# Allegro board FPMemory.brd
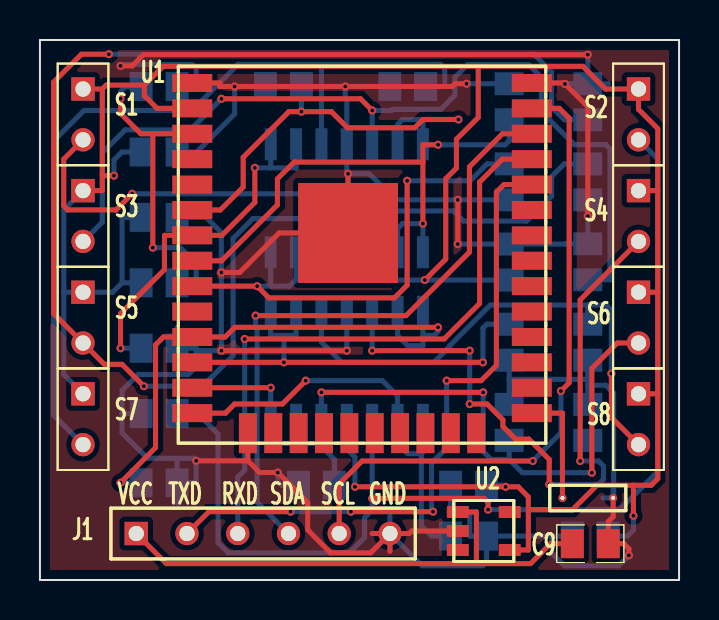
[diagram p0: board, top side]
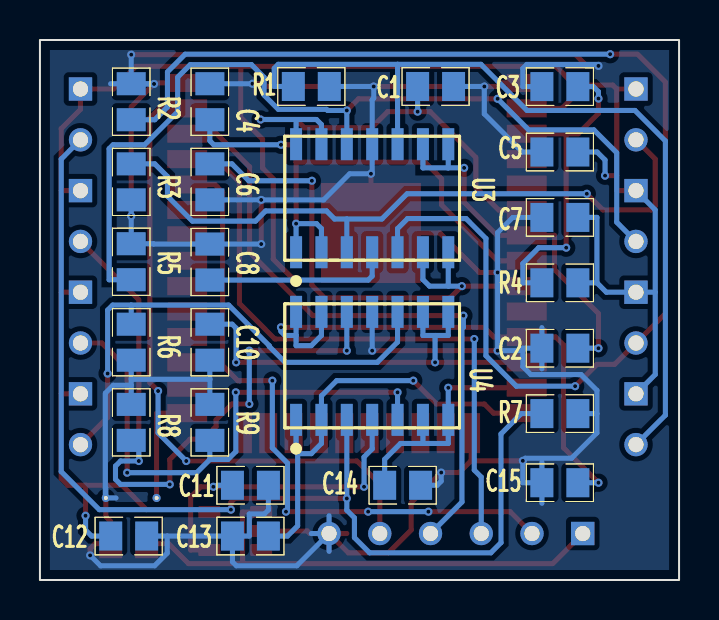
[diagram p1: board, bottom side, seen from below]

Outline 32 x 27 mm; copper layers: TOP, BOTTOM. Coordinates in mm from the lower left corner of the outline.
Outline path: rectangle 0,0 32,27

## Design rules (mm)
constraint set DEFAULT: min track width 0.254, pair gap 0.254

## Placement (name value [footprint] x y rotation side)
C1  0.1uF  [CAP0805]  12.19 24.68 0 bottom
C2  0.1uF  [CAP0805]  5.97 11.59 0 bottom
C3  0.1uF  [CAP0805]  5.97 24.67 180 bottom
C4  0.1uF  [CAP0805]  23.49 23.91 270 bottom
C5  10uF  [CAP0805]  5.97 21.4 180 bottom
C6  0.1uF  [CAP0805]  23.49 19.91 270 bottom
C7  0.1uF  [CAP0805]  5.97 18.13 180 bottom
C8  0.1uF  [CAP0805]  23.49 15.9 90 bottom
C9  1uF  [CAP0805]  27.56 1.82 0 top
C10  0.1uF  [CAP0805]  23.49 11.89 270 bottom
C11  2.2uF  [CAP0805]  21.46 4.74 180 bottom
C12  0.1uF  [CAP0805]  27.56 2.2 180 bottom
C13  0.1uF  [CAP0805]  21.46 2.2 180 bottom
C14  0.1uF  [CAP0805]  13.84 4.74 180 bottom
C15  0.1uF  [CAP0805]  5.97 4.86 180 bottom
J1  UART  [SIP-6]  4.82 2.32 90 top
J2  CON2  [SIP-2S]  26.16 4.1 90 top
R1  50k  [RES0805]  18.41 24.68 180 bottom
R2  50k  [RES0805]  27.43 23.91 270 bottom
R3  50k  [RES0805]  27.43 19.91 270 bottom
R4  10k  [RES0805]  5.97 14.86 180 bottom
R5  50k  [RES0805]  27.43 15.91 90 bottom
R6  50k  [RES0805]  27.43 11.89 270 bottom
R7  50k  [RES0805]  5.97 8.32 180 bottom
R8  50k  [RES0805]  27.43 7.88 90 bottom
R9  50k  [RES0805]  23.49 7.88 270 bottom
S1  IMS-C20B  [SIP-2]  2.16 24.55 0 top
S2  IMS-C20B  [SIP-2]  29.97 24.55 0 top
S3  IMS-C20B  [SIP-2]  2.16 19.47 0 top
S4  IMS-C20B  [SIP-2]  29.97 19.47 0 top
S5  IMS-C20B  [SIP-2]  2.16 14.39 0 top
S6  IMS-C20B  [SIP-2]  29.97 14.39 0 top
S7  IMS-C20B  [SIP-2]  2.16 9.31 0 top
S8  IMS-C20B  [SIP-2]  29.97 9.31 0 top
U1  ESP32  [SMD-38]  16.13 19.34 0 top
U2  TPS70933  [SOT-23]  22.22 2.45 0 top
U3  LM324  [SOIC-14]  15.36 19.09 90 bottom
U4  LM324  [SOIC-14]  15.36 10.71 90 bottom

## Library data of the parts
C1-C15 = CAP NP
J1 = UART
J2 = CON2
R1-R9 = R
S1-S8 = IMS-C20B
U1 = ESP32
U2 = TPS70933
U3 U4 = LM324

## Footprints (pads in the part's own frame, mm; a bottom-side part is the same pattern mirrored in y, then rotated)
CAP0805
  rect 1.15x1.45 smd: 1(-0.9,0) 2(0.9,0)
RES0805
  rect 1.15x1.45 smd: 1(-0.9,0) 2(0.9,0)
SIP-2
  rect 1.168x1.168 hole 0.762: 1(0,0)
  round 1.168 hole 0.762: 2(0,-2.54)
SIP-2S
  round 0.406 hole 0.203: 1(0,0) 2(0,-2.54)
SIP-6
  rect 1.168x1.168 hole 0.762: 1(0,0)
  round 1.168 hole 0.762: 2(0,-2.54) 3(0,-5.08) 4(0,-7.62) 5(0,-10.16) 6(0,-12.7)
SMD-38
  rect 2x0.9 smd: 1(-8.5,5.51) 2(-8.5,4.24) 3(-8.5,2.97) 4(-8.5,1.7) 5(-8.5,0.43) 6(-8.5,-0.84) 7(-8.5,-2.11) 8(-8.5,-3.38) 9(-8.5,-4.65) 10(-8.5,-5.92) 11(-8.5,-7.19) 12(-8.5,-8.46) 13(-8.5,-9.73) 14(-8.5,-11) 25(8.5,-11) 26(8.5,-9.73) 27(8.5,-8.46) 28(8.5,-7.19) 29(8.5,-5.92) 30(8.5,-4.65) 31(8.5,-3.38) 32(8.5,-2.11) 33(8.5,-0.84) 34(8.5,0.43) 35(8.5,1.7) 36(8.5,2.97) 37(8.5,4.24) 38(8.5,5.51)
  rect 0.9x2 smd: 15(-5.715,-12) 16(-4.445,-12) 17(-3.175,-12) 18(-1.905,-12) 19(-0.635,-12) 20(0.635,-12) 21(1.905,-12) 22(3.175,-12) 23(4.445,-12) 24(5.715,-12)
  rect 5x5 smd: 39(-0.7,-1.99)
SOIC-14
  rect 1.6x0.6 smd: 1(-2.7,3.81) 2(-2.7,2.54) 3(-2.7,1.27) 4(-2.7,0) 5(-2.7,-1.27) 6(-2.7,-2.54) 7(-2.7,-3.81) 8(2.7,-3.81) 9(2.7,-2.54) 10(2.7,-1.27) 11(2.7,0) 12(2.7,1.27) 13(2.7,2.54) 14(2.7,3.81)
SOT-23
  rrect 1.1x0.6 smd: 1(-1.3,0.95) 2(-1.3,0) 3(-1.3,-0.95) 4(1.3,-0.95) 5(1.3,0.95)

## Nets
GND: C1.1 C2.2 C3.1 C4.1 C5.1 C6.2 C7.1 C8.2 C9.2 C10.2 C11.2 C12.2 C13.1 C14.2 C15.1 J1.6 J2.2(P2) R1.2 R2.1 R3.2 R5.2 R6.2 R7.2 R8.2 R9.1 U1.1 U1.15 U1.38 U1.39 U2.2 U3.11 U4.11
VCC: C9.1 J1.1(VCC) U2.1
VDD33: C5.2 C7.2 C8.1 C11.1 C12.1 R4.2 S1.1 S2.1 S3.1 S4.1 S5.1 S6.1 S7.1 S8.1 U1.2 U2.4(OUT) U3.4(VCC) U4.4(VCC)
ADC1_CH4: C4.2 U1.8 U3.1 U3.2
ADC1_CH5: C6.1 U1.9 U3.6 U3.7
ADC1_CH6: C1.2 U1.6 U3.13 U3.14
ADC1_CH7: C2.1 U1.7 U3.8 U3.9
ADC2_CH5: C13.2 U1.14 U4.1 U4.2
ADC2_CH6: C14.1 U1.13 U4.6 U4.7
ADC2_CH7: C10.1 U1.12 U4.8 U4.9
ADC2_CH9: C15.2 U1.11 U4.13 U4.14
RXD: J1.3 U1.35(TXD0)
SCL: J1.5 U1.37
SDA: J1.4 U1.36
TXD: J1.2 U1.34
N01133: R3.1 S1.2(-) U3.3
N02072: R2.2 S5.2(-) U3.5
N02980: R5.1 S3.2(-) U3.12
N03024: R1.1 S7.2(-) U3.10
N05883: C3.2 R4.1 U1.3
N05919: J2.1 U1.25
N44841: R7.1 S2.2(-) U4.3
N44913: R8.1 S4.2(-) U4.12
N45127: R9.2 S6.2(-) U4.5
N45143: R6.1 S8.2(-) U4.10

Pads without a net: U1 4 5 10 16 17 18 19 20 21 22 23 24 26 27 28 29 30 31 32 33; U2 3 5

## Via types
v1: diameter 0.406, hole 0.203, TOP to BOTTOM, 61 vias

## Routing (per net, layer and track width the routed paths; a pad name or vN(x,y) marks a point on that pad's centre or on a via; arc(x,y) is an arc through that point)
GND: length 203.5
  TOP w0.254: J1.6 16.56,1.36 14.55,1.36 13.41,2.5 13.41,3.87 v1(11.91,5.37) 11,5.37 10.41,5.96 ; J1.6 16.63,2.32 ; J1.6 17.52,1.43 ; J1.6 18.49,2.32 18.62,2.45 U2.2 ; v1(27.43,18.19) 27.43,23.66 v1(26.29,24.8) 26.24,24.85 U1.38 ; v1(9.08,15.38) 10,15.38 11.98,17.35 U1.39 v1(15.43,20.31) ; v1(20.92,16.8) v1(20.92,19.01) ; v1(15.36,11.47) v1(9.08,11.47) ; v1(29.49,1.23) 29.49,1.56 29.24,1.82 C9.2 28.46,2.92 28.7,3.17 J2.2 ; U1.1 9.01,24.85 9.01,24.68 v1(9.75,24.68) v1(15.29,24.68) 20.64,24.68 20.78,24.81 v1(21.36,24.81) ; U1.15 10.41,5.96 ; 10.41,5.96 v1(7.82,5.96) ; v1(27.43,26.27) 5.18,26.27 4.62,25.71 v1(4.03,25.71)
  BOTTOM w0.254: v1(20.92,16.8) C8.2 26.31,16.8 26.32,16.81 R5.2 v1(27.43,18.19) R3.2 ; R6.2 27.43,10.03 ; 27.43,10.03 27.43,9.74 ; 27.43,10.03 23.49,10.03 ; 26.4,24.81 R2.1 ; R2.1 28.46,24.81 ; R2.1 27.42,24.8 v1(26.29,24.8) ; R2.1 v1(27.43,26.27) ; C13.1 21.52,2.2 21.52,3.3 20.76,3.3 20.56,3.5 C11.2 ; C13.1 25.62,2.2 ; C13.1 22.36,0.91 22.16,0.71 19.14,0.71 J1.6 ; 7.82,11.47 v1(9.08,11.47) v1(9.08,15.38) 9.08,17.37 8.32,18.13 C7.1 ; 7.82,11.47 7.82,10.67 7.43,10.27 4.9,10.27 4.11,9.48 4.11,8.32 ; 7.82,11.47 7.82,11.59 C2.2 ; R1.2 v1(15.29,24.68) 15.29,24.09 15.36,24.01 15.36,20.37 v1(15.43,20.31) 16.49,20.31 17.8,19.01 v1(20.92,19.01) C6.2 ; R7.2 4.11,8.32 ; 4.11,8.32 4.11,7.36 5.38,6.09 7.7,6.09 v1(7.82,5.96) 7.82,4.86 C15.1 ; C3.1 7.82,24.67 7.82,25.58 7.62,25.78 4.1,25.78 v1(4.03,25.71) ; J1.6 17.52,3.21 ; J1.6 18.41,2.32 ; J1.6 17.52,1.43 ; 27.43,9.74 R8.2 ; 27.43,9.74 28.33,9.74 28.73,9.34 28.73,4.13 J2.2 ; 25.62,2.2 25.62,1.34 26.26,0.71 28.97,0.71 v1(29.49,1.23) ; 25.62,2.2 C12.2 ; 23.49,10.03 C10.2 ; 23.49,10.03 R9.1 ; J2.2 28.19,4.1 ; J2.2 28.7,4.61 ; C5.1 7.84,21.4 9.75,23.3 v1(9.75,24.68) C1.1 ; 15.36,13.41 v1(15.36,11.47) ; C2.2 6.87,12.62 ; C2.2 6.87,10.56 ; C4.1 v1(21.36,24.81) ; C15.1 6.87,5.89 ; C15.1 6.87,3.83 ; C14.2 12.11,4.74 11.91,4.94 v1(11.91,5.37)
VCC: length 26.4
  TOP w0.254: 21.85,0.82 21.85,3.4 U2.1 ; 21.85,0.82 24.57,0.82 25.56,1.82 C9.1 ; 21.85,0.82 6.33,0.82 J1.1
VDD33: length 131.8
  TOP w0.254: 3.12,24.55 3.32,24.75 5.23,24.75 ; 3.12,24.55 S1.1 ; 3.12,24.55 3.12,20.22 ; 5.23,24.75 5.23,24.22 5.86,23.58 U1.2 ; 5.23,24.75 6.17,25.68 21.95,25.68 ; 30.94,19.47 30.94,14.39 ; 30.94,19.47 30.94,22.57 29.97,23.53 S2.1 28.32,24.55 27.18,25.68 21.95,25.68 ; 30.94,19.47 S4.1 ; 30.94,14.39 S6.1 ; 30.94,14.39 30.94,9.31 ; S8.1 30.94,9.31 ; 30.94,9.31 30.94,5.07 30.6,4.74 29.72,4.74 ; 21.95,25.68 21.95,23.13 20.85,22.04 20.85,20.6 20.32,20.06 20.32,16.04 v1(19.27,15) ; 29.72,4.74 27.89,4.74 26.67,3.52 24.45,3.52 ; 29.72,4.74 v1(29.72,3.21) ; 3.12,20.22 3.12,19.47 S3.1 ; 3.12,20.22 v1(3.71,20.22) ; U2.4 24.45,1.5 24.45,3.52 ; 24.45,3.52 24.45,4.15 23.95,4.66 v1(23.32,4.66) v1(15.77,4.66)
  BOTTOM w0.254: U4.4 15.36,6.56 15.77,6.15 v1(15.77,4.66) ; R4.2 4.11,14.86 ; 4.11,14.86 4.11,18.13 C7.2 ; 4.11,14.86 3.64,14.39 S5.1 1.19,14.39 ; 1.19,14.39 1.19,18.5 S3.1 ; 1.19,14.39 1.19,10.27 S7.1 ; C11.1 23.11,4.74 23.19,4.66 v1(23.32,4.66) ; C12.1 29.41,2.2 29.72,2.5 v1(29.72,3.21) ; U3.4 15.36,15.2 15.56,15 v1(19.27,15) C8.1 ; C5.2 4.1,21.4 3.71,21 v1(3.71,20.22)
ADC1_CH4: length 27.7
  TOP w0.254: 19.17,20.9 19.17,21.76 v1(19.93,21.76) ; 19.17,20.9 v1(19.17,17.82) ; 19.17,20.9 12.73,20.9 11.89,20.06 11.89,18.76 9.1,15.96 U1.8
  BOTTOM w0.254: U3.2 17.9,17.57 18.15,17.82 v1(19.17,17.82) U3.1 ; C4.2 23.49,21.96 23.29,21.76 v1(19.93,21.76)
ADC1_CH5: length 27.1
  TOP w0.254: v1(18.38,19.96) 18.38,14.74 17.75,14.11 11.46,14.11 v1(10.87,14.69) U1.9
  BOTTOM w0.254: U3.6 12.82,15.02 12.49,14.69 11.55,14.69 ; v1(18.38,19.96) 21.54,19.96 22.39,20.81 C6.1 ; 11.55,14.69 U3.7 ; 11.55,14.69 v1(10.87,14.69)
ADC1_CH6: length 23.4
  TOP w0.254: U1.6 9.03,18.5 10.18,19.65 10.18,21.13 12.46,23.42 v1(13.09,23.42) 14.59,23.42 15.4,22.61 18.76,22.61 19.17,23.03 v1(20.95,23.03)
  BOTTOM w0.254: C1.2 v1(13.09,23.42) ; v1(20.95,23.03) 19.17,23.03 ; 19.17,23.03 U3.14 ; 19.17,23.03 18.16,23.03 17.9,22.77 17.9,21.79
ADC1_CH7: length 18.9
  TOP w0.254: v1(10.76,20.61) 10.76,18.88 9.11,17.23 U1.7 6.24,17.23 6.24,15.52 4.03,13.32 v1(4.03,11.59)
  BOTTOM w0.254: 11.55,20.61 12.82,20.61 U3.9 ; 11.55,20.61 v1(10.76,20.61) ; 11.55,20.61 U3.8 ; C2.1 v1(4.03,11.59)
ADC2_CH5: length 22.1
  TOP w0.254: v1(13.31,9.97) 12.14,8.8 9.74,8.8 9.29,8.34 U1.14
  BOTTOM w0.254: 19.1,6.32 19.17,6.4 U4.1 ; 19.1,6.32 19.1,2.71 19.6,2.2 C13.2 ; 19.1,6.32 18.41,6.32 17.9,6.83 U4.2 17.9,9.21 17.14,9.97 v1(13.31,9.97)
ADC2_CH6: length 12.7
  TOP w0.254: U1.13 v1(11.55,9.61)
  BOTTOM w0.254: 12.82,6.83 11.55,6.83 U4.7 v1(11.55,9.61) ; 12.82,6.83 U4.6 ; 12.82,6.83 13.95,6.83 14.74,6.03 C14.1
ADC2_CH7: length 22.6
  TOP w0.254: U1.12 v1(12.22,10.88) v1(22.18,10.88)
  BOTTOM w0.254: C10.1 22.38,12.79 22.18,12.59 v1(22.18,10.88) ; 12.22,12.23 11.55,12.23 U4.8 ; 12.22,12.23 v1(12.22,10.88) ; 12.22,12.23 12.82,12.23 U4.9
ADC2_CH9: length 28.6
  TOP w0.254: v1(4.03,4.86) 5.79,6.62 5.79,11.76 6.18,12.15 U1.11 9.27,12.15 9.76,12.63 v1(19.93,12.63)
  BOTTOM w0.254: v1(19.93,12.63) 19.93,12.43 19.73,12.23 19.17,12.23 ; 19.17,12.23 U4.14 ; 19.17,12.23 19.17,11.72 18.41,11.72 17.9,12.23 17.9,13.41 ; C15.2 v1(4.03,4.86)
RXD: length 31.5
  TOP w0.254: v1(10.25,12.05) 20.23,12.05 22.01,13.83 22.01,19.9 23.16,21.04 U1.35
  BOTTOM w0.254: J1.3 9.9,5.15 10.25,5.5 v1(10.25,12.05)
SCL: length 32.6
  TOP w0.254: U1.37 26.01,23.58 26.5,23.09 26.5,9.86 v1(26.08,9.45) ; J1.5 14.98,4.81 16.13,5.95 v1(24.68,5.95)
  BOTTOM w0.254: v1(26.08,9.45) 26.08,7.36 v1(24.68,5.95)
SDA: length 31.7
  TOP w0.254: U1.36 23.16,22.31 21.5,20.66 21.5,16.39 18.33,13.22 v1(10.8,13.22)
  BOTTOM w0.254: J1.4 10.87,3.9 10.87,12.56 10.8,12.63 v1(10.8,13.22)
TXD: length 33.1
  TOP w0.254: U1.34 23.23,19.77 22.85,19.39 22.85,10.73 22.09,9.97 v1(20.36,9.97) ; v1(12.55,3.42) 8.46,3.42 J1.2 ; v1(19.68,3.42) v1(15.57,3.42)
  BOTTOM w0.254: v1(19.68,3.42) 19.6,3.49 19.6,5.84 20.36,6.6 v1(20.36,9.97) ; v1(15.57,3.42) v1(12.55,3.42)
N01133: length 34.7
  TOP w0.254: S1.2 1.19,21.04 1.19,18.7 1.39,18.5 3.81,18.5 v1(4.62,19.31)
  BOTTOM w0.254: v1(4.62,19.31) 13.62,19.31 14.88,18.05 16.63,18.05 ; 16.63,18.05 16.63,16.39 ; 16.63,18.05 17.25,18.05 17.65,18.45 20.7,18.45 21.21,17.95 24.37,17.95 25.62,19.19 25.62,20.17 26.25,20.81 R3.1
N02072: length 64.5
  TOP w0.254: v1(5.2,9.69) 4.11,10.78 3.22,10.78 S5.2 0.68,13.32 0.68,24.89 2.08,26.29 v1(3.45,26.29)
  BOTTOM w0.254: 14.09,16.39 14.09,17.57 13.59,18.07 10.67,18.07 9.67,17.07 9.67,11.21 8.14,9.69 v1(5.2,9.69) ; R2.2 26.25,23.01 25.62,23.65 25.62,25.4 24.73,26.29 v1(3.45,26.29)
N02980: length 45.2
  TOP w0.254: v1(16.63,23.48) 16.05,24.06 v1(9.08,24.06)
  BOTTOM w0.254: R5.1 28.54,15.01 28.54,21.56 28.34,21.76 26.76,21.76 25.11,23.41 25.11,25.14 24.47,25.77 21.41,25.77 20.78,25.14 20.78,24.25 20.06,23.53 17.65,23.53 17.59,23.48 v1(16.63,23.48) U3.12 ; 2.16,16.93 3.12,17.89 3.12,21.36 4.27,22.51 7.53,22.51 v1(9.08,24.06)
N03024: length 42.9
  BOTTOM w0.254: R1.1 20.27,24.68 20.27,25.58 20.07,25.78 14.09,25.78 ; 14.09,25.78 9.92,25.78 7.61,23.48 2.21,23.48 0.68,21.95 0.68,8.24 S7.2 ; 14.09,25.78 U3.10
N05883: length 16.4
  TOP w0.254: 5.65,22.31 v1(5.65,16.62) ; 5.65,22.31 5.05,22.31 4.03,23.33 v1(4.03,24.07) ; 5.65,22.31 U1.3
  BOTTOM w0.254: v1(5.65,16.62) 7.03,16.62 7.82,15.82 7.82,14.86 R4.1 ; v1(4.03,24.07) 4.03,24.42 4.29,24.67 C3.2
N05919: length 5.8
  TOP w0.254: J2.1 26.16,8.34 U1.25
N44841: length 54.3
  TOP w0.254: v1(22.44,3.52) 22.44,3.88 22.24,4.08 17.22,4.08 17.22,4.08 v1(16.63,4.08)
  BOTTOM w0.254: v1(22.44,3.52) 29.03,3.52 30.94,5.42 30.94,21.04 S2.2 ; R7.1 7.9,8.32 8.92,7.3 8.92,1.87 9.42,1.36 15.49,1.36 16.25,2.12 16.25,3.11 16.63,3.49 v1(16.63,4.08) 16.63,8.01
N44913: length 34.4
  TOP w0.254: v1(21.52,8.8) 22.39,8.8 23.18,8.01 23.18,7.68 23.82,7.04 24.48,7.04 25.5,6.03 v1(25.5,4.78) ; v1(16.63,11.47) v1(21.52,11.47) ; v1(27.05,5.95) 27.05,14.01 29.97,16.93
  BOTTOM w0.254: R8.1 27.05,6.98 v1(27.05,5.95) 27.96,5.95 28.22,5.7 28.22,5.04 27.96,4.78 v1(25.5,4.78) ; U4.12 v1(16.63,11.47) ; v1(21.52,11.47) v1(21.52,8.8)
N45127: length 27.3
  TOP w0.254: v1(27.63,5.37) 27.63,10.58 28.9,11.85 S6.2 ; v1(14.09,9.38) v1(22.19,9.38)
  BOTTOM w0.254: 23.49,6.03 24.15,5.37 v1(27.63,5.37) ; 23.49,6.03 22.59,6.03 22.19,6.42 v1(22.19,9.38) ; 23.49,6.03 R9.2 ; 14.09,8.01 v1(14.09,9.38)
N45143: length 26
  TOP w0.254: v1(28.61,10.32) 28.61,8.13 S8.2
  BOTTOM w0.254: 27.43,13.75 22.55,13.75 20.52,11.71 20.52,11.68 19.72,10.88 15.11,10.88 14.09,11.9 U4.10 ; 27.43,13.75 R6.1 ; 27.43,13.75 28.36,13.75 28.61,13.49 v1(28.61,10.32)

## Copper pours and planes (outline as drawn; the poured copper is in the pictures)
GND on TOP: 0.5,26.5 31.5,26.5 31.5,0.5 0.5,0.5 ; 32 cut-outs
GND on BOTTOM: 0.5,26.5 31.5,26.5 31.5,0.5 0.5,0.5 ; 10 cut-outs

## Text on the board
Ref Des/Silkscreen Top: VCC | TXD | RXD | SDA | SCL | GND | U2
NCLEGEND-1-2: FIGURE | FINISHED_SIZE | 8.0 | 30.0 | DRILL CHART: TOP to BOTTOM | ALL UNITS ARE IN MILS | PLATED | QTY | 63 | 13 | 9
